# Altium PCB USBDM_SWD_SER_JS16CWJ.PcbDoc
Units mm, origin at the board's own origin, x right, y up, seen from the top; angles counter-clockwise.
Board outline 50 x 50 mm, 2 copper layers (Top Layer, Bottom Layer); 40 components, 33 nets, 150 pads, 47 vias.
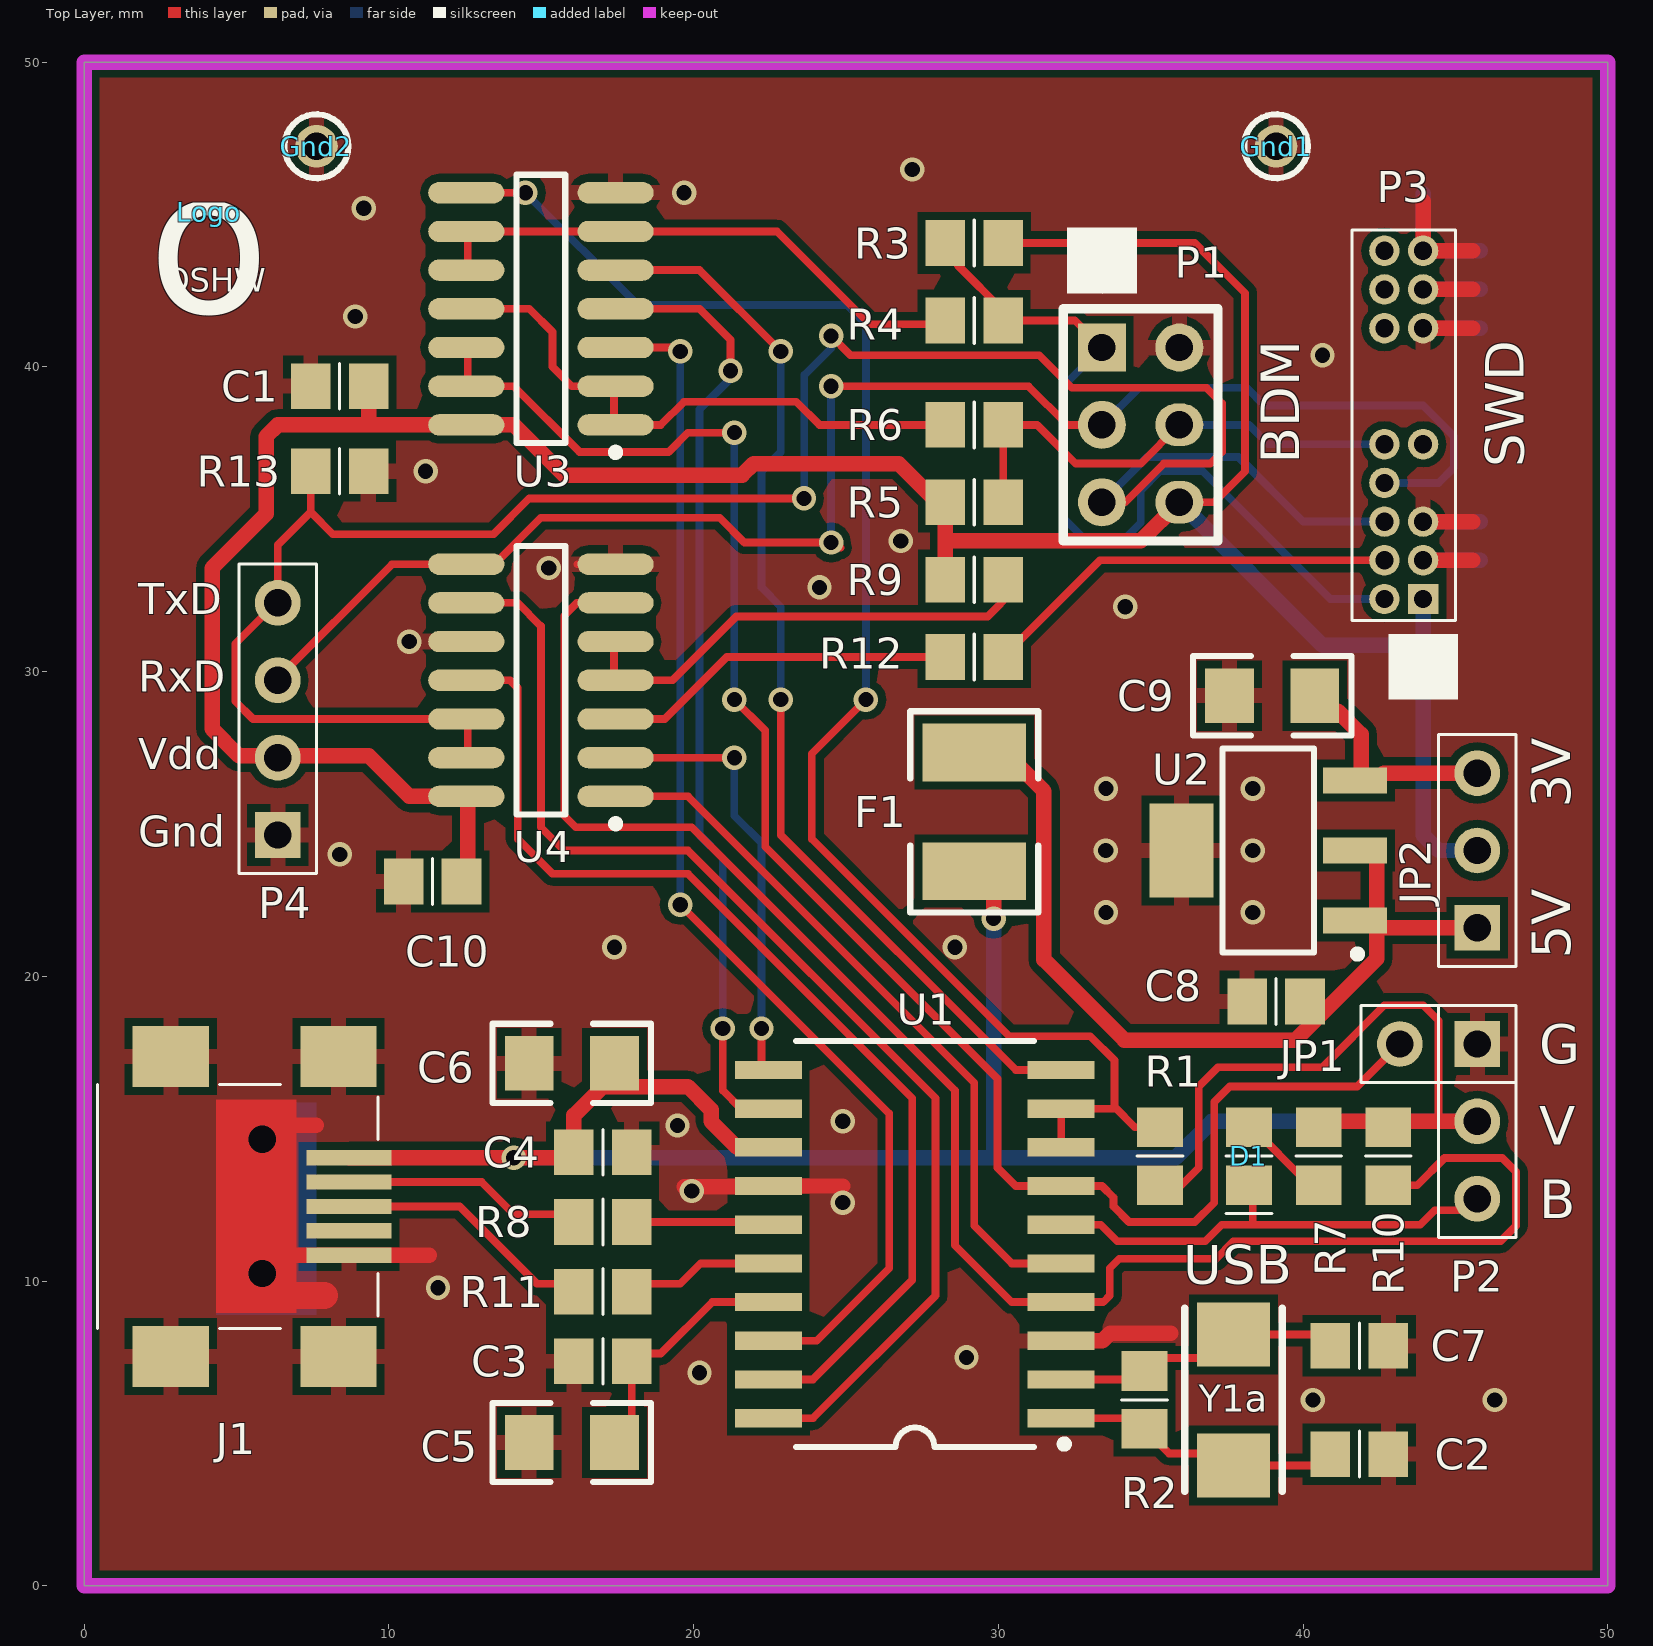
[diagram p0: Top Layer view]
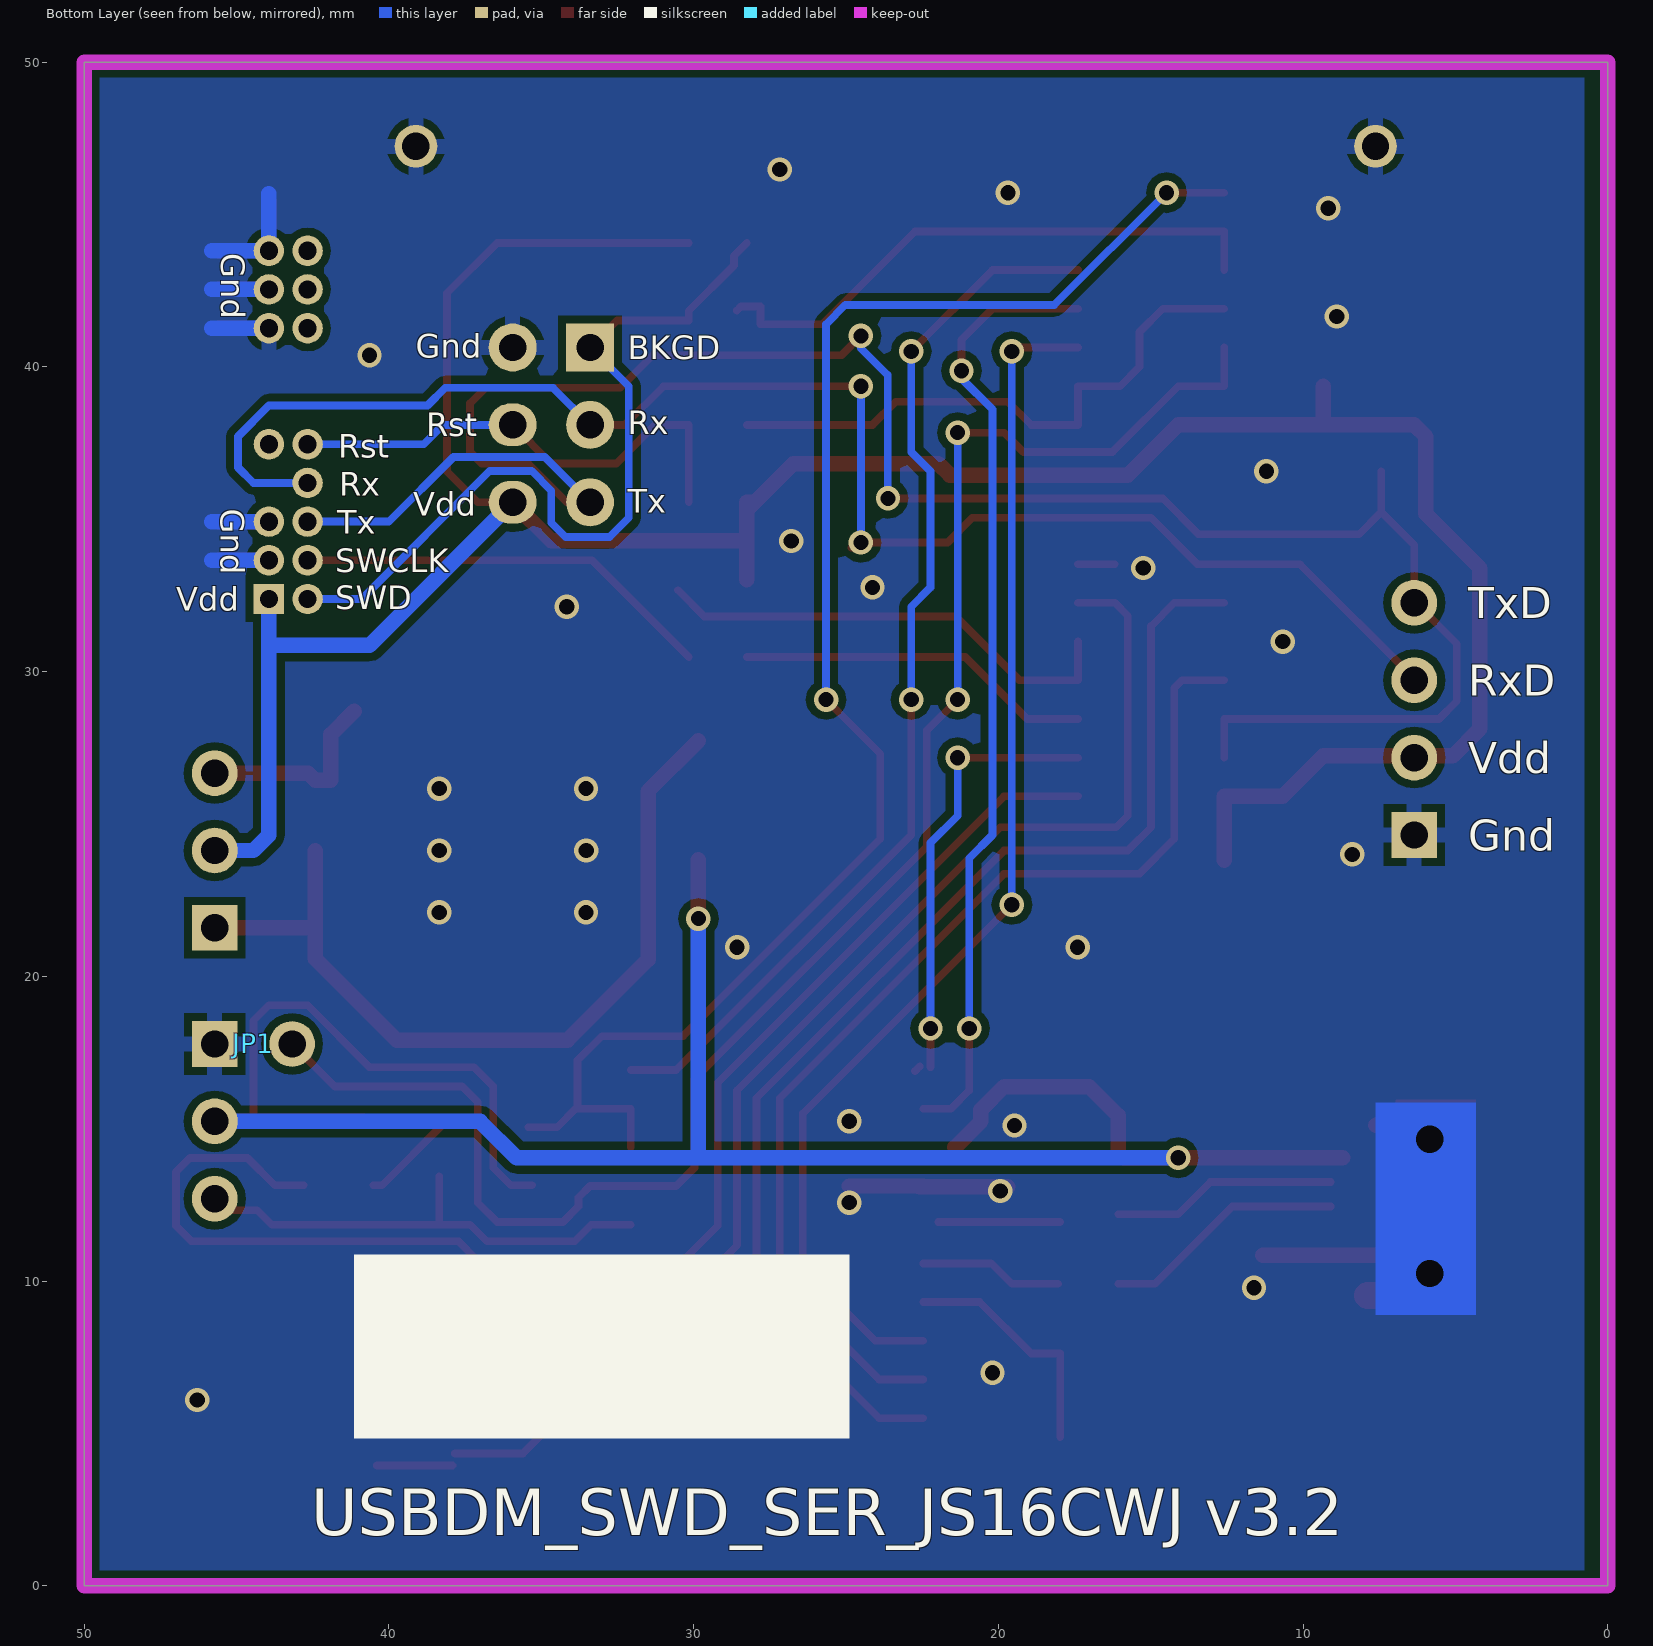
[diagram p1: Bottom Layer view, seen from below]
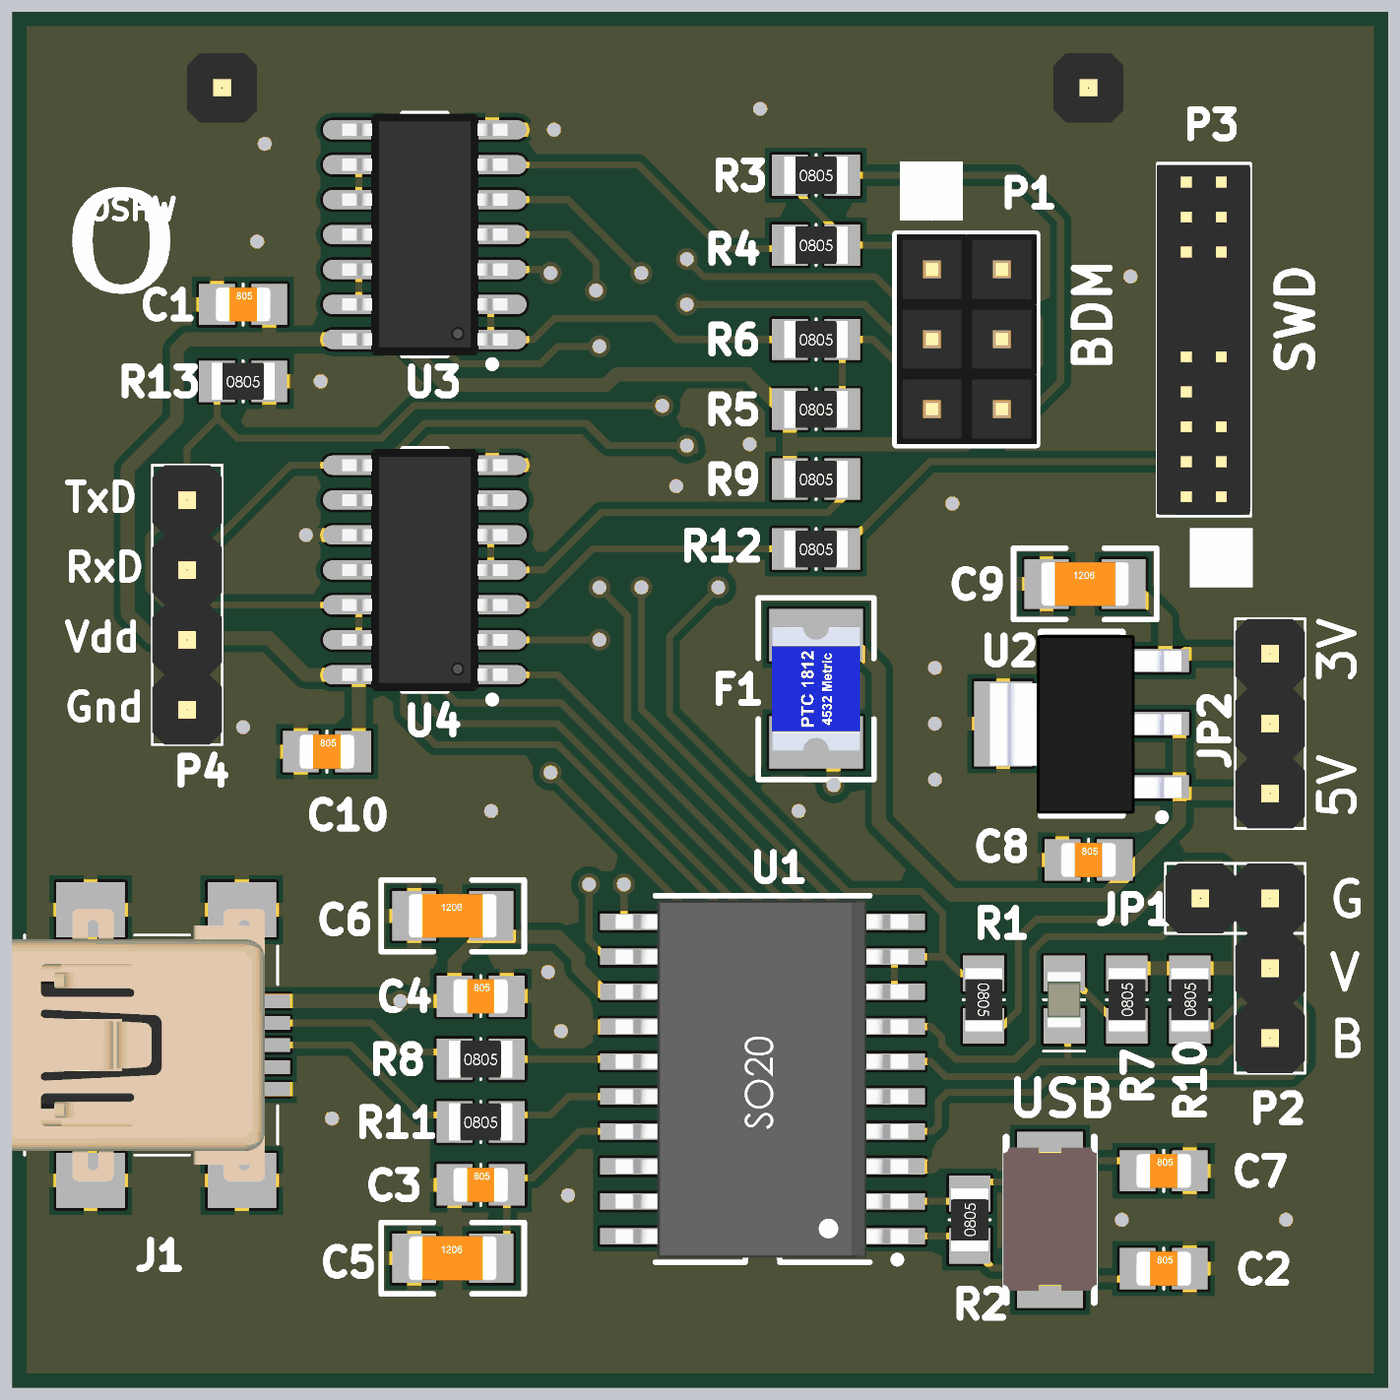
[diagram p2: 3D render of the assembled board from above, using the file's embedded part models]

## Layer stack, top to bottom
Top Solder: solder mask 0.0102, Solder Resist, Dk 3.5
Top Layer: signal copper 0.0356
Dielectric1: dielectric 0.32, FR-4, Dk 4.8
Bottom Layer: signal copper 0.0356
Bottom Solder: solder mask 0.0102, Solder Resist, Dk 3.5

## Board outline
0,0 50,0 50,50 0,50

## Design rules (kind name [scope] priority, off if disabled: settings)
Clearance "PolyGon Clearance" [All vs Inpoly] p1: gap=0.254
Clearance Clearance_1 [All] p2: gap=0.203
FabricationTestPointUsage TestPointUsage [All] p1: valid=0 allowmultiple=FALSE
FabricationTestpoint Testpoint [All] p1: side=3 testpointundercomponent=TRUE minsize=1.016 maxsize=2.54 preferedsize=1.524 minholesize=0 maxholesize=1.016 preferedholesize=0.813 testpointgrid=0.025 allowsidetop=TRUE allowsidebottom=TRUE usegrid=TRUE gridtolerance=0
HoleSize [All] p1: absolutevalues=TRUE maxlimit=7.62 minlimit=0.025 maxpercent=80.000 minpercent=20.000
PolygonConnect PolygonConnect_1 [InNet('GND') vs isvia] p1: connectstyle=Direct reliefconductorwidth=0.254 reliefentries=4 polygonreliefangle="90 Angle" airgapwidth=0.254
PolygonConnect [All] p2: connectstyle=Relief reliefconductorwidth=0.508 reliefentries=4 polygonreliefangle="90 Angle" airgapwidth=0.254
RoomDefinition USBDM_SWD_SER_JS16CWJ [InComponentClass('USBDM_SWD_SER_JS16CWJ')] p1: confinementstyle=ConfineIn formatcopy=TRUE lockcomponents=FALSE outline -1.524,-1.143 51.308,-1.143 51.308,51.308 -1.524,51.308
RoutingVias [All] p1: holewidth=0.711 width=1.27 viastyle="Through Hole" minholewidth=0.711 minwidth=1.27 maxholewidth=0.711 maxwidth=1.27
SilkToSolderMaskClearance SilkscreenOverComponentPads [IsPad] p1: minsilkscreentomaskgap=0.254 clearancetoexposedcopper=TRUE
SolderMaskExpansion [All] p1: expansion=0.102
Width [All] p1: maxlimit=1.016 minlimit=0.254 preferedwidth=0.254
26 further rules are at their usual default settings.

## Components (designator, comment, footprint, x,y, rotation, side; value= is the part's Value field where it differs from the comment)
C1 "100nF" CCNP2012-0805 8.382,39.37 r0 top
C2 "18pF" CCNP2012-0805 41.849,4.318 r0 top
C3 "470nF" CCNP2012-0805 17.018,7.366 r0 top
C4 "100nF" CCNP2012-0805 17.018,14.224 r0 top
C5 "10uF/10V" CCNP3216-1206 16.002,4.699 r0 top
C6 "10uF/10V" CCNP3216-1206 16.002,17.145 r0 top
C7 "18pF" CCNP2012-0805 41.849,7.874 r0 top
C8 "100nF" CCNP2012-0805 39.116,19.177 r0 top
C9 "4u7F/10V" CCNP3216-1206 38.989,29.21 r0 top
C10 "100nF" CCNP2012-0805 11.43,23.114 r0 top
D1 "LED Green" LED2012-0805-GREEN 38.227,14.097 r270 top
F1 "MINISMDC050F-2" PTC4532-1812 29.21,25.4 r90 top
Gnd1 "TP" "PCBPIN - 0.9mm" 39.116,47.244 r0 top
Gnd2 "TP" "PCBPIN - 0.9mm" 7.62,47.244 r0 top
J1 "USB_MINI_CONNECTOR" "USB_MINI - SMT2" 8.439,12.446 r0 top
JP1 "PIN2X1" HDR1X2S 45.72,17.78 r0 bottom
JP2 "PIN3X1" HDR1X3S 45.72,21.59 r90 top
Logo "OSHW Logo" OSHW 4.089,45.085 r0 top
P1 "BDM2X3" BDM 33.401,40.64 r270 top
P2 "PIN3X1" HDR1X3S 45.72,17.78 r270 top
P3 "SWD-2x10" "SWD-2x10 - reduced" 43.942,32.385 r90 top
P4 "Serial" HDR1X4S 6.35,24.638 r90 top
R1 "1k5" CR2012-0805 35.306,14.097 r270 top
R2 "1M" CR2012-0805 34.798,6.096 r90 top
R3 "100K" CR2012-0805 29.21,44.069 r0 top
R4 "47R" CR2012-0805 29.21,41.529 r0 top
R5 "100K" CR2012-0805 29.21,35.56 r0 top
R6 "47R" CR2012-0805 29.21,38.1 r0 top
R7 "680R" CR2012-0805 40.513,14.097 r90 top
R8 "33R" CR2012-0805 17.018,11.938 r0 top
R9 "100K" CR2012-0805 29.21,33.02 r0 top
R10 "1k5" CR2012-0805 42.799,14.097 r90 top
R11 "33R" CR2012-0805 17.018,9.652 r0 top
R12 "47R" CR2012-0805 29.21,30.48 r0 top
R13 "100K" CR2012-0805 8.382,36.576 r0 top
U1 "MC9S08JS16CWJ" SO-G20 27.264,13.753 r90 top
U2 "MC33375ST-3.3T3" SOT223 38.862,24.13 r180 top
U3 "SN74LV125AD" SO-14_M 14.986,41.91 r180 top
U4 "SN74LV125AD" SO-14_M 14.986,29.718 r180 top
Y1a "CX5032GB12000H0PESZZ" "XTAL_SMT - 5x3.2" 37.719,6.096 r270 top

## Footprints (in the part's own frame and the unit in brackets; to place one, negate y for a bottom-side part, rotate by r counter-clockwise, add the part's x,y. Pads: shape width x height; smd on the part's side, far side on the other; paste and mask are expansions set on the pad)
BDM [mil] "HCS12 style BDM connector"
  rect 62x62 hole 35.43: 1(0,0)
  round 62 hole 35.43: 2(0,100) 3(100,0) 5(200,0)
  oval 55.12x62 hole 35.43: 4(100,100) 6(200,100)
  silkscreen extent -124,-50 250,150, body extent -50,-49 250,151, height 333
CCNP2012-0805 [mm]
  rect 1.3x1.5 smd: 1(-0.95,0) 2(0.95,0)
  silkscreen extent 0,-0.75 0,0.75, body extent -1,-0.62 1,0.63, height 0.78
CCNP3216-1206 [mm]
  rect 1.6x1.8 smd: 1(-1.4,0) 2(1.4,0)
  silkscreen extent -2.6,-1.3 2.6,1.3, body extent -1.6,-0.8 1.6,0.8, height 1
CR2012-0805 [mm]
  rect 1.3x1.5 smd: 1(-0.95,0) 2(0.95,0)
  silkscreen extent 0,-0.75 0,0.75, body extent -1.15,-0.67 1.15,0.68, height 0.76
HDR1X2S [mm]
  rect 1.5x1.5 hole 0.9: 1(0,0)
  round 1.5 hole 0.9: 2(-2.54,0)
  body extent -3.81,-1.27 1.27,1.27, height 6
HDR1X3S [mm] "Connector; Header; 3 Position; Straight"
  rect 1.5x1.5 hole 0.9: 1(0,0)
  round 1.5 hole 0.9: 2(2.54,0) 3(5.08,0)
  silkscreen extent -1.27,-1.27 6.35,1.27, body extent -1.27,-1.27 6.35,1.27, height 6
HDR1X4S [mm] "Connector; Header; 5 Position; Straight"
  rect 1.5x1.5 hole 0.9: 1(0,0)
  round 1.5 hole 0.9: 2(2.54,0) 3(5.08,0) 4(7.62,0)
  silkscreen extent -1.27,-1.27 8.89,1.27, body extent -1.27,-1.27 8.89,1.27, height 6
LED2012-0805-GREEN [mm] "SMT-LED 0805"
  rect 1.3x1.5 smd: A(-0.95,0) K(0.95,0)
  silkscreen extent 0,-0.75 1.88,0.75, body extent -1,-0.6 1,0.6, height 0.75
OSHW [mm] "OSHW Logo"
"PCBPIN - 0.9mm" [mm]
  round 1.4 hole 0.9: 1(0,0)
  silkscreen extent -1.05,-1.05 1.05,1.05, body extent -1.27,-1.27 1.27,1.27, height 6
PTC4532-1812 [mm]
  rect 1.9x3.4 smd: 1(-1.95,0) 2(1.95,0)
  silkscreen extent -3.3,-2.1 3.3,2.1, body extent -2.25,-1.6 2.25,1.6, height 0.55
SO-14_M [mm] "14-Pin Small Outline Integrated Circuit 1.27 mm Pitch, IPC Low Density"
  oval 2.5x0.7 smd: 1(-2.45,3.81) 2(-2.45,2.54) 3(-2.45,1.27) 4(-2.45,0) 5(-2.45,-1.27) 6(-2.45,-2.54) 7(-2.45,-3.81) 8(2.45,-3.81) 9(2.45,-2.54) 10(2.45,-1.27) 11(2.45,0) 12(2.45,1.27) 13(2.45,2.54) 14(2.45,3.81)
  silkscreen extent -2.57,-4.4 0.8,4.83, body extent -3,-4.4 3,4.4, height 1.7
SO-G20 [mm] "Small Outline, Plastic; 20 Leads; Body Width 7.5 mm"
  rect 0.6x2.2 smd: 1(-8.255,-4.8) 2(-6.985,-4.8) 3(-5.715,-4.8) 4(-4.445,-4.8) 5(-3.175,-4.8) 6(-1.905,-4.8) 7(-0.635,-4.8) 8(0.635,-4.8) 9(1.905,-4.8) 10(3.175,-4.8) 11(3.175,4.8) 12(1.905,4.8) 13(0.635,4.8) 14(-0.635,4.8) 15(-1.905,4.8) 16(-3.175,4.8) 17(-4.445,4.8) 18(-5.715,4.8) 19(-6.985,4.8) 20(-8.255,4.8)
  silkscreen extent -9.23,-5.03 4.12,3.9, body extent -9.04,-5.29 3.96,5.34, height 2.66
SOT223 [mm] "SOT223, 5-Leads, Body 6.5x3.5mm, Pitch 1.5mm, Lead Span 7mm, IPC High Density"
  rect 2.1x0.85 smd: 1(-2.85,2.3) 2(-2.85,0) 3(-2.85,-2.3)
  rect 2.1x3.1 smd: 4(2.85,0)
  silkscreen extent -3.05,-3.35 1.5,3.52, body extent -3.63,-3.22 3.33,3.28, height 1.7
"SWD-2x10 - reduced" [mm] "Connector; SWD; 2x10 Position"
  rect 1x1 hole 0.6: 1(0,0)
  round 1 hole 0.6: 2(0,1.27) 3(1.27,0) 4(1.27,1.27) 5(2.54,0) 6(2.54,1.27) 8(3.81,1.27) 9(5.08,0) 10(5.08,1.27) 15(8.89,0) 16(8.89,1.27) 17(10.16,0) 18(10.16,1.27) 19(11.43,0) 20(11.43,1.27)
  silkscreen extent -2.6,-1.07 12.12,2.34, body extent -0.64,-1.06 12.06,2.34, height 4.5
"USB_MINI - SMT2" [mm] "USB Mini Connector (F 1363522, Tyco/AMP 1734035-2)"
  round 0.8 hole 0.9: 0(-2.6,-2.2) 0(-2.6,2.2)
  rect 2.8x0.5 smd: D+(0.25,0) D-(0.25,0.8) G(0.25,-1.6) ID(0.25,-0.8) VBus(0.25,1.6)
  rect 2.5x2 smd: Shield(-5.6,-4.925) Shield(-5.6,4.925) Shield(-0.1,-4.925) Shield(-0.1,4.925)
  silkscreen extent -8,-4 1.2,4, body extent -8.46,-4.95 0.74,4.95, height 4.14
"XTAL_SMT - 5x3.2" [mm] "Crystal SMT 1368769 or similar"
  rect 2.1x2.4 smd: 1(-2.15,0) 2(2.15,0)
  silkscreen extent -3,-1.6 3,1.6, body extent -2.63,-1.7 2.57,1.7, height 1.3

## Part data
C1 C2 C3 C4 C7 C8 C10: library part Cap, "Capacitor SMT"
C5 C6 C9: library part Cap_CCNP_1206, "Capacitor SMT 1206"
D1: library part LED-0805-Green, "LED 0805 Green"
F1: "PolySwitch miniSMDC Series, 500 mA, 1 A, 24 VDC"
Gnd1 Gnd2: "Test Point"
J1: "USB Mini-B Connector"
P3: library part SWD2X10-Reduced, "SWD Connector 2x10-Pin"
P4: library part "Header 4", "Header, 4-Pin"
R1 R2 R3 R4 R5 R6 R7 R8 R9 R10 R11 R12 R13: library part Res, "Resistor SMT"
U1: "Microcontroller with USB"
U2: "Low Dropout 300mA Voltage Regulator with ON/OFF Control"
U3 U4: "Quad 3-state Buffer (5V Tolerant)"
Y1a: library part "Crystal - CX5032GB12000H0PESZZ", "AVX CRYSTAL, SM, CX-53F, 12MHZ"

## Via types
v1: diameter 0.8, hole 0.5, Top Layer to Bottom Layer, tented both sides, 47 vias

## Nets (pads, with @x,y where several pads share a name; then routed paths per layer and width w, separated by ;. In a path a pad name is that pad's centre, name@x,y a point inside that pad or via, vN(x,y) a via of type N, cw(c..) or ccw(c..) an arc to the next point about the centre after c; other vN are vias at no path point)
3V: C9.2 JP2.3 U2.3 | length 6.5
  Top Layer w0.508: C9.2@41.148,28.702 41.91,27.94 U2.3@41.91,26.43 ; U2.3@41.908,26.43 42.416,26.43 42.656,26.67 JP2.3
5V: C4.1 C6.2 F1.1 J1.VBus P2.2 R1.2 R7.2 R10.2 U1.13 | length 78.8
  Top Layer w0.254: R1.2 36.007,13.147 36.576,13.716 36.576,16.383 37.211,17.018 40.64,17.018 42.672,19.05 43.942,19.05 44.45,18.542 44.45,15.24
  Top Layer w0.508: J1.VBus 15.89,14.046 C4.1 16.068,15.433 17.018,16.383 19.812,16.383 20.574,15.621 20.574,15.24 U1.13@21.426,14.388 ; v1(29.845,21.895) F1.1@29.845,23.831 ; R7.2@40.828,15.24 44.45,15.24 P2.2
  Bottom Layer w0.508: v1(14.097,14.046) 35.814,14.046 37.008,15.24 P2.2 ; 29.845,14.173 v1(29.845,21.895)
BKGD/LED: D1.K P2.3 U1.6 | length 15.8
  Top Layer w0.254: U1.6 33.364,11.848 33.909,11.303 36.793,11.303 37.338,11.848 38.354,11.848 ; D1.K@38.354,13.428 38.354,11.848 ; P2.3@45.593,12.319 44.323,12.319 43.852,11.848 38.354,11.848
BKGD/SWD_IO: R4.1 U3.6 U3.9 U3.10 | length 19.2
  Top Layer w0.254: U3.10@12.586,43.18 12.586,44.45 17.386,44.45 22.733,44.45 25.781,41.402 27.803,41.402 27.803,41.986 28.449,41.986 R4.1@28.583,41.852
BKGD/SWDIO_DRV: U1.12 U3.4 | length 31
  Top Layer w0.254: U3.4@17.386,41.91 20.193,41.91 21.209,40.894 v1(21.209,39.878) ; v1(20.955,18.288) 20.955,16.256 21.553,15.658 U1.12
  Bottom Layer w0.254: v1@20.955,18.669 20.955,23.876 20.193,24.638 20.193,38.608 21.209,39.624 v1(21.209,39.878)
BKGD/SWDIO_I: R1.1 U1.8 U1.9 U3.8 | length 52
  Top Layer w0.254: U3.8@12.586,45.72 v1(14.478,45.72) ; v1(25.654,29.083) 23.876,27.305 23.876,24.511 30.353,18.034 33.02,18.034 33.811,17.243 33.811,15.719 34.483,15.047 R1.1@35.433,15.047 ; U1.8 U1.9 33.811,15.658
  Bottom Layer w0.254: v1(14.478,45.72) 18.161,42.037 25.019,42.037 25.654,41.402 v1(25.654,29.083) v1@25.654,28.956
BKGD/SWDIO_O: U1.10 U3.5 | length 35.4
  Top Layer w0.254: U3.5@17.386,43.18 20.193,43.18 v1(22.86,40.513) ; v1(22.86,29.083) 22.86,24.638 30.57,16.928 U1.10
  Bottom Layer w0.254: v1(22.86,29.083) 22.86,32.131 22.225,32.766 22.225,36.576 22.86,37.211 v1(22.86,40.513)
GND: C1.1 C2.2 C3.1 C4.2 C5.1 C6.1 C7.2 C8.1 C9.1 C10.1 Gnd1.1 Gnd2.1 J1.0 J1.G J1.Shield JP1.1 P1.2 P2.1 P3.3 P3.5 P3.15 P3.17 P3.19 P4.1 R13.2 U1.3 U1.14 U2.4 U3.7 U4.7 U4.10 | length 38.6
  Top Layer w0.254: U4.7@16.19,33.528 U4.7@17.386,33.528
  Top Layer w0.508: 6.172,10.846 11.328,10.846 ; 6.731,15.113 7.62,15.113 ; v1@19.685,13.093 U1.14@22.591,13.093 ; U1.14 24.892,13.118 ; U1.3 33.418,8.038 33.672,8.292 35.662,8.292 ; P3.3 45.568,33.655 ; P3.5 45.568,34.925 ; P3.15 45.568,41.275 ; P3.17 45.568,42.545 ; 43.942,45.441 P3.19 45.568,43.815
  Top Layer w0.889: 6.604,9.525 7.874,9.525
  Bottom Layer w0.508: P3.3 45.822,33.655 ; P3.5 45.822,34.925 ; P3.15 45.822,41.275 ; P3.17 45.822,42.545 ; 43.942,45.695 P3.19 45.822,43.815
  other v1: 40.325,6.096 46.294,6.096 20.193,6.985 28.956,7.493 11.608,9.779 24.892,12.573 19.939,12.954 19.47,15.103 24.892,15.24 17.399,20.955 28.575,20.955 33.532,22.098 38.354,22.098 8.382,24.003 33.528,24.13 38.354,24.13 33.532,26.162 38.354,26.162 10.668,30.988 34.163,32.131 24.13,32.766 15.24,33.401 26.797,34.29 11.201,36.576 40.64,40.386 8.89,41.656 9.169,45.212 19.685,45.72 27.178,46.482
NetD1_A: D1.A R7.1 | length 3.4
  Top Layer w0.254: D1.A@38.513,15.147 38.227,15.147 40.227,13.147 R7.1
OSC1: C2.1 R2.1 U1.1 Y1a.2 | length 7.9
  Top Layer w0.254: U1.1 R2.1@34.065,5.498 ; R2.1 35.602,4.342 Y1a.2@37.846,4.342 ; Y1a.2@37.912,3.946 C2.1@40.4,3.946
OSC2: C7.1 R2.2 U1.2 Y1a.1 | length 7.7
  Top Layer w0.254: U1.2 R2.2@34.695,6.768 ; R2.2@35.118,7.469 Y1a.1@37.719,7.469 ; Y1a.1@37.912,8.246 C7.1@40.4,8.246
RST_IO: R6.1 U3.1 U3.2 U3.11 | length 19.3
  Top Layer w0.254: U3.11@12.586,41.91 14.605,41.91 15.367,41.148 15.367,40.005 16.002,39.37 17.386,39.37 17.386,38.1 18.923,38.1 19.685,38.862 23.368,38.862 24.13,38.1 R6.1
RSTN_I: U1.18 U3.3 | length 40.1
  Top Layer w0.254: U3.3@17.386,40.64 19.431,40.64 v1(19.558,40.513) ; v1(19.558,22.352) 26.416,15.494 26.416,10.417 24.037,8.038 U1.18
  Bottom Layer w0.254: v1(19.558,22.352) v1(19.558,40.513)
RSTN_O: JP1.2 U1.7 U3.12 U3.13 | length 57.4
  Top Layer w0.254: U3.12@12.586,40.64 12.586,39.37 14.097,39.37 16.256,37.211 19.177,37.211 19.812,37.846 v1(21.336,37.846) ; v1(21.336,29.083) 22.352,28.067 22.352,24.257 29.972,16.637 29.972,13.716 30.57,13.118 33.401,13.118 33.782,12.737 33.782,12.446 34.29,11.938 36.449,11.938 37.084,12.573 37.084,15.875 37.592,16.383 41.783,16.383 JP1.2
  Bottom Layer w0.254: v1(21.336,29.083) v1(21.336,37.846)
RXD: U1.19 U4.11 | length 35.2
  Top Layer w0.254: U4.11@12.586,29.718 13.97,29.718 14.224,29.464 14.224,24.511 15.367,23.368 19.812,23.368 27.178,16.002 27.178,10.033 23.913,6.768 U1.19
SWDCLK_DRV: U1.5 U4.1 | length 23.8
  Top Layer w0.254: U4.1@17.386,25.908 19.812,25.908 29.21,16.51 29.21,11.811 30.443,10.578 U1.5
SWDCLK_O: U1.11 U4.2 | length 14.7
  Top Layer w0.254: U4.2@17.386,27.178 v1(21.336,27.178) ; U1.11@22.225,17.018 v1(22.225,18.288) ; U1.11@22.58,17.044 U1.11@22.733,16.891
  Bottom Layer w0.254: v1(21.336,27.178) 21.336,25.273 22.225,24.384 v1(22.225,18.288)
SWO_I: R10.1 U1.4 U4.6 | length 57.3
  Top Layer w0.254: U4.6@17.386,32.258 16.171,32.258 15.748,31.835 15.748,25.273 16.129,24.892 19.939,24.892 28.575,16.256 28.575,11.176 30.443,9.308 33.438,9.308 33.655,9.525 33.655,10.414 33.972,10.731 37.148,10.731 37.719,11.303 46.482,11.303 46.99,11.811 46.99,13.589 46.543,14.036 44.643,14.036 43.754,13.147 R10.1
T_BKGD/SWDIO: P1.1 P3.2 R3.1 R4.2 | length 27.1
  Top Layer w0.254: R3.1 28.677,43.652 28.677,43.332 30.16,41.849 R4.2 32.512,41.529 P1.1
  Bottom Layer w0.254: P1.1 32.131,39.37 32.131,35.052 32.766,34.417 34.198,34.417 34.671,34.89 34.671,35.941 35.32,36.59 36.689,36.59 40.894,32.385 P3.2
T_DBG_RX: P1.3 P3.8 P4.3 U4.8 | length 51.8
  Top Layer w0.254: P4.3@6.35,29.777 10.101,33.528 12.586,33.528 13.462,33.528 14.986,35.052 20.853,35.052 21.666,34.239 v1(24.511,34.239) ; v1@24.511,34.067 v1@24.816,34.067 ; v1(24.511,39.37) 30.988,39.37 32.258,38.1 P1.3
  Bottom Layer w0.254: v1(24.511,34.239) v1(24.511,39.37) ; P1.3 34.62,39.319 38.151,39.319 38.735,38.735 43.942,38.735 44.958,37.719 44.958,36.703 44.45,36.195 P3.8
T_DBG_TX: P1.5 P3.6 P4.4 R13.1 U4.12 U4.13 | length 71.2
  Top Layer w0.254: P4.4 P4.4@6.35,32.317 ; R13.1 7.432,35.24 ; U4.13@12.586,27.178 12.586,28.448 5.538,28.448 4.953,29.033 4.953,30.92 P4.4@6.35,32.317 ; v1(23.622,35.687) 14.605,35.687 13.432,34.514 8.158,34.514 7.432,35.24 ; v1(24.511,41.021) 25.146,40.386 31.344,40.386 32.41,39.319 36.83,39.319 37.338,38.811 37.338,37.211 36.957,36.83 35.433,36.83 34.163,35.56 P1.5 ; P4.4@6.35,32.317 6.35,34.158 7.432,35.24
  Bottom Layer w0.254: v1(23.622,35.687) 23.631,35.696 23.631,39.735 24.511,40.615 v1(24.511,41.021) ; P1.5 34.888,37.047 37.883,37.047 40.005,34.925 P3.6
T_RSTN: P1.4 P3.10 R5.2 R6.2 | length 16.4
  Top Layer w0.254: R5.2 R6.2 31.269,38.1 32.539,36.83 34.671,36.83 P1.4
  Bottom Layer w0.254: P1.4 38.227,38.1 38.862,37.465 P3.10
T_SWDCLK: P3.4 R12.2 | length 13.8
  Top Layer w0.254: R12.2 33.335,33.655 P3.4
T_SWDCLK_O: R12.1 U4.3 | length 11.7
  Top Layer w0.254: U4.3@17.386,28.448 19.05,28.448 21.082,30.48 R12.1
T_SWO: R9.2 U4.4 U4.5 | length 15.6
  Top Layer w0.254: U4.5@17.386,30.988 17.386,29.718 19.304,29.718 21.397,31.811 29.652,31.811 R9.2@30.511,32.67
TXD: U1.20 U4.9 | length 39.6
  Top Layer w0.254: U4.9@12.586,32.258 14.224,32.258 14.986,31.496 14.986,24.892 15.748,24.13 19.812,24.13 27.94,16.002 27.94,9.525 23.913,5.498 U1.20
USB+: J1.D+ R11.1 | length 8
  Top Layer w0.254: J1.D+@9.086,12.446 12.319,12.446 14.859,9.906 R11.1@16.068,9.906
USB-: J1.D- R8.1 | length 7.4
  Top Layer w0.254: J1.D-@9.086,13.246 13.043,13.246 14.097,12.192 R8.1@16.068,12.192
USBDM: R8.2 U1.15 | length 4
  Top Layer w0.254: R8.2 U1.15@21.971,11.938
USBDP: R11.2 U1.16 | length 4.7
  Top Layer w0.254: R11.2@18.034,9.906 19.558,9.906 20.23,10.578 U1.16
VDD: C8.2 F1.2 JP2.1 U2.1 U2.2 | length 27.8
  Top Layer w0.508: F1.2@29.845,27.731 31.496,26.08 31.496,20.549 34.138,17.907 39.751,17.907 42.416,20.572 U2.2@42.416,24.13 ; U2.1@42.416,21.59 JP2.1
VDD_BDM: C1.2 C10.2 JP2.2 P1.6 P3.1 P4.2 R3.2 R5.1 R9.1 U3.14 U4.14 | length 94.4
  Top Layer w0.254: R3.2 36.449,44.069 38.1,42.418 38.1,36.576 37.084,35.56 P1.6
  Top Layer w0.508: 9.332,38.161 C1.2 ; C10.2@12.586,23.81 12.586,25.908 10.668,25.908 9.339,27.237 5.08,27.237 4.191,28.126 4.191,33.401 5.969,35.179 5.969,37.719 6.35,38.1 12.586,38.1 14.097,38.1 15.748,36.449 21.59,36.449 21.971,36.83 26.727,36.83 R5.1@28.124,35.433 ; R5.1@28.124,35.564 R5.1@28.256,35.564 ; R9.1 R5.1 ; 28.26,34.29 34.671,34.29 P1.6 ; R5.1@28.26,35.433 R5.1 ; R5.1@28.26,35.564 R5.1@28.256,35.564 ; R5.1@28.256,35.564 R5.1
  Bottom Layer w0.508: P1.6 40.64,30.861 43.942,30.861 ; P3.1 43.942,30.861 ; JP2.2 44.45,24.13 43.942,24.638 43.942,30.861
VUSB: C3.2 C5.2 U1.17 | length 9.2
  Top Layer w0.254: C5.2@17.968,4.868 17.968,7.62 18.923,7.62 20.611,9.308 U1.17@22.225,9.308 ; 20.992,9.308 U1.17@22.225,9.308 ; U1.17 U1.17@22.225,9.308
pads on no net: J1.ID P3.9 P3.16 P3.18 P3.20

## Polygon pours and split planes (outlines as drawn)
GND on Top Layer "Bottom Layer-GND" (solid, remove dead copper, pour order 1001): -0.508,0 -0.508,50.546 50.292,50.546 50.292,0
GND on Bottom Layer "Top Layer-GND" (solid, remove dead copper, pour order 1000): 0.762,0.254 0.762,49.53 49.53,49.53 49.53,0.254

## Keep-outs
Keep-Out Layer:
  the board outline again, w0.5

## Other copper
Top Layer:
  rectangle net GND: 4.318,8.944 6.96,15.965
Bottom Layer:
  rectangle net GND: 4.318,8.89 7.62,15.863

## Silkscreen, mask and mechanical layers (free items; w line width, h text height)
Top Overlay:
  rectangle: 42.799,29.083 45.085,31.242
  rectangle: 32.258,42.418 34.544,44.577
  text "BDM" at 39.878,36.83 h1.27 r90
  text "SWD" at 47.244,36.703 h1.27 r90
  text "TxD" at 1.778,31.877 h1.02
  text "RxD" at 1.778,29.337 h1.02
  text "Vdd" at 1.778,26.797 h1.02
  text "3V" at 48.768,25.527 h1.27 r90
  text "Gnd" at 1.778,24.257 h1.02
  text "5V" at 48.768,20.574 h1.27 r90
  text "G" at 47.752,17.145 h1.27
  text "V" at 47.752,14.478 h1.27
  text "B" at 47.752,12.065 h1.27
  text "USB" at 36.068,9.906 h1.27
Bottom Overlay:
  rectangle: 24.892,4.826 41.148,10.871
  text "Gnd" at 45.501,43.729 h0.76 r90
  text "Gnd" at 39.125,40.3 h0.76
  text "BKGD" at 32.166,40.25 h0.76
  text "Rx" at 32.166,37.786 h0.76
  text "Rst" at 38.77,37.735 h0.76
  text "Rst" at 41.665,37.024 h0.76
  text "Rx" at 41.64,35.779 h0.76
  text "Gnd" at 45.526,35.347 h0.76 r90
  text "Tx" at 32.166,35.22 h0.76
  text "Vdd" at 39.202,35.119 h0.76
  text "Tx" at 41.691,34.535 h0.76
  text "SWCLK" at 41.767,33.265 h0.76
  text "SWD" at 41.767,32.045 h0.76
  text "Vdd" at 46.99,32.004 h0.76
  text "TxD" at 4.572,31.75 h1.02
  text "RxD" at 4.572,29.21 h1.02
  text "Vdd" at 4.572,26.67 h1.02
  text "Gnd" at 4.572,24.13 h1.02
  text "USBDM_SWD_SER_JS16CWJ v3.2" at 42.545,1.651 h1.52
Mechanical 1:
  the board outline again, w0.254
  text "Board Outline this layer" at 7.62,51.689 h1.27
  text ".Pcb_File_Name_No_Path" at 52.832,13.081 h1.27 r90

## Dimensions
0,50 to 0,0 on Mechanical 1
0,0 to 50,0 on Mechanical 1

## Text inside footprints (layer, text, board x,y; h text height)
Logo: Top Overlay "o" at 6.096,39.853 h10.16; Top Overlay "OSHW" at 2.642,42.469 h0.76